# Altium PCB MiniDisplay.PcbDoc
Units mil, origin at the board's own origin, x right, y up, seen from the top; angles counter-clockwise.
Board outline 1889.76 x 1889.76 mil, 2 copper layers (Top Layer, Bottom Layer), stack 12.8 mil thick; 76 components, 91 nets, 408 pads, 90 vias.
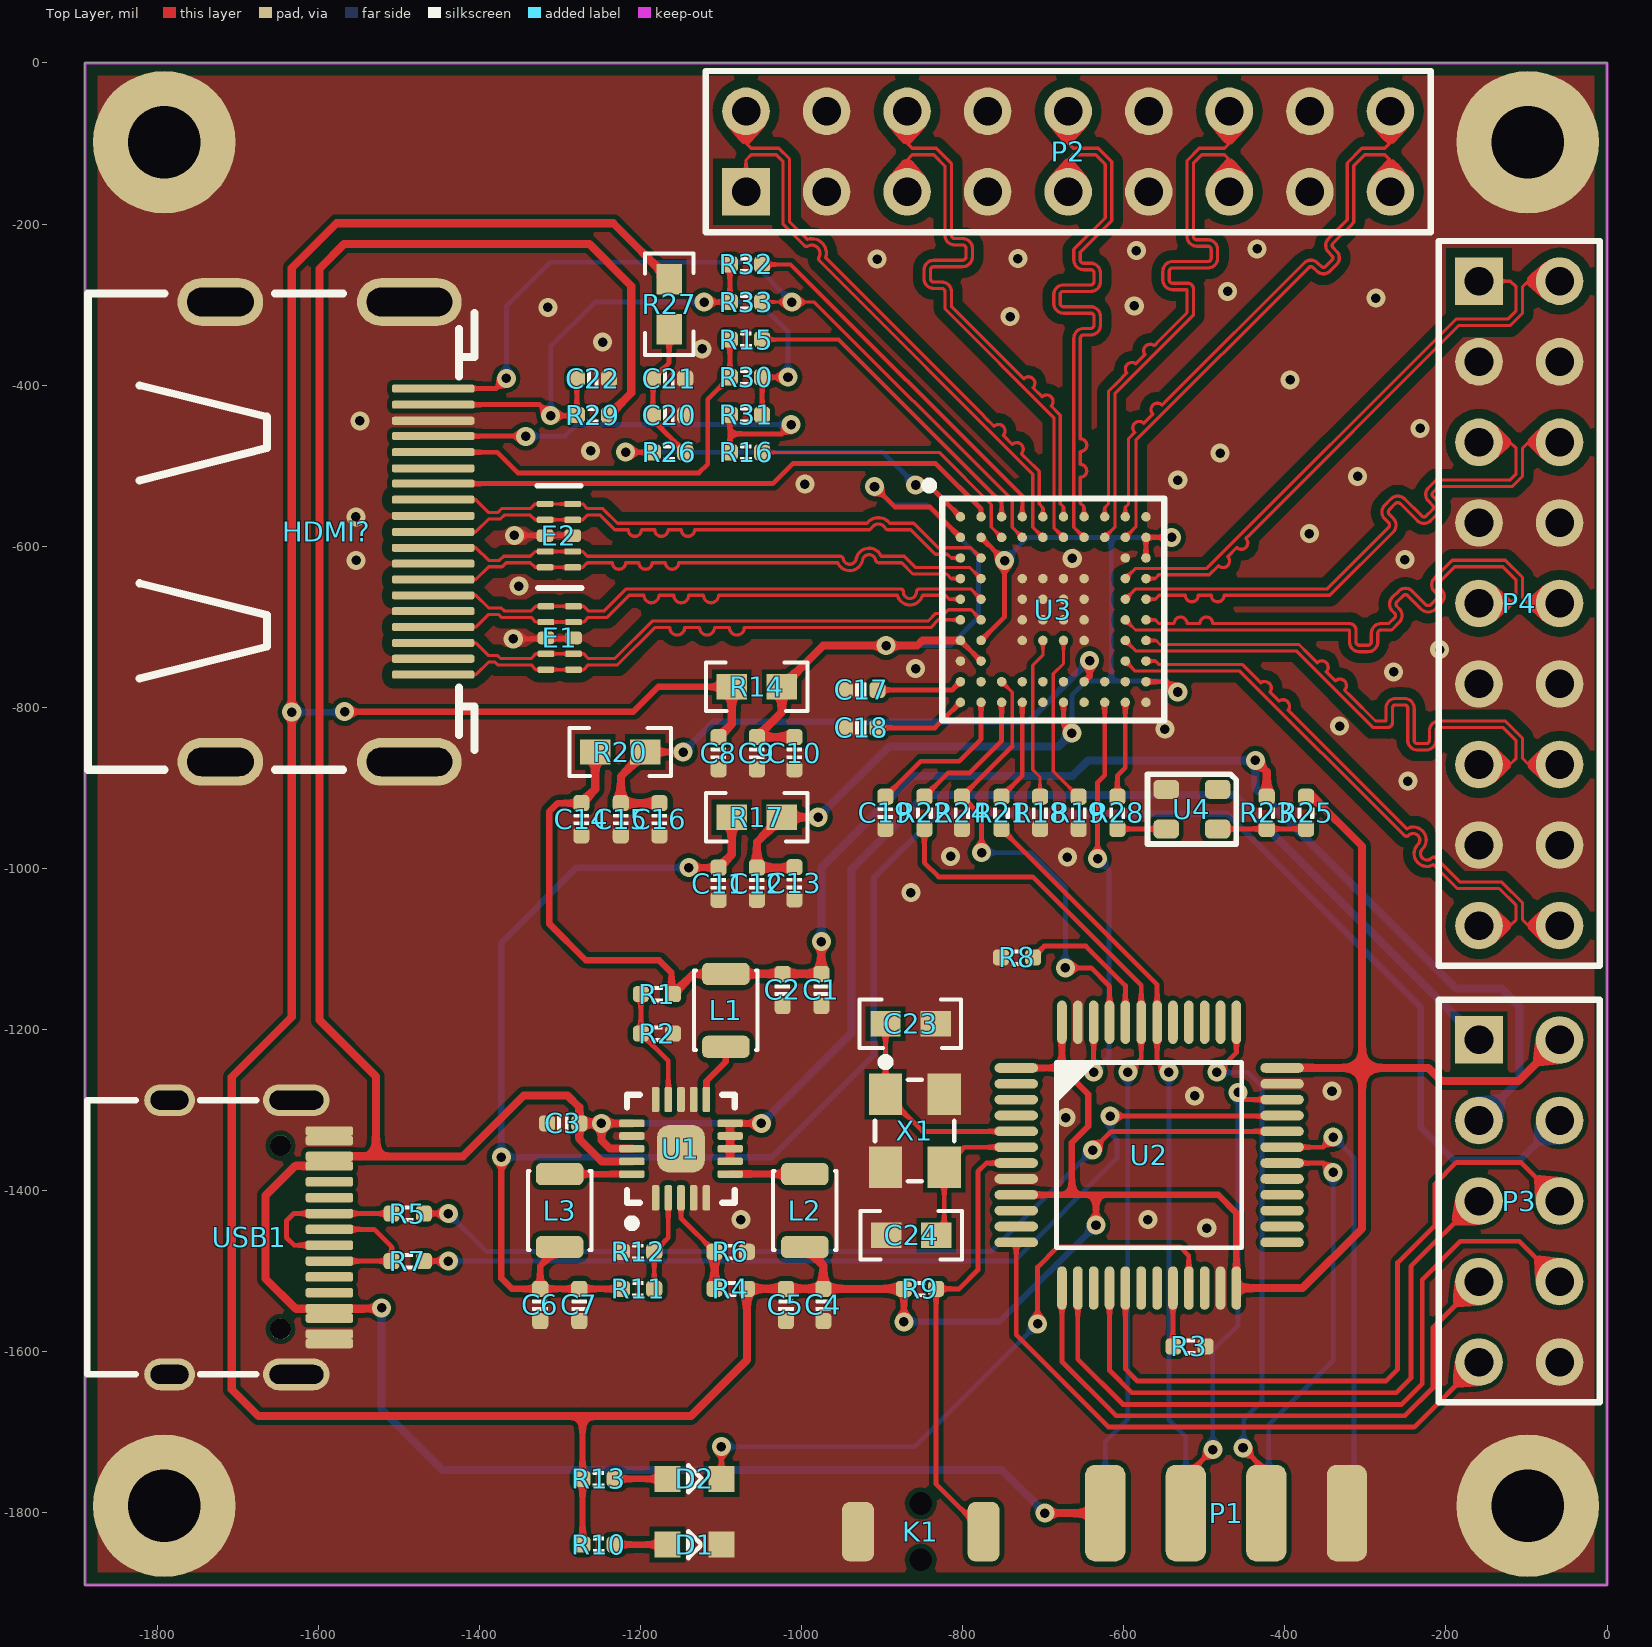
[diagram p0: Top Layer view]
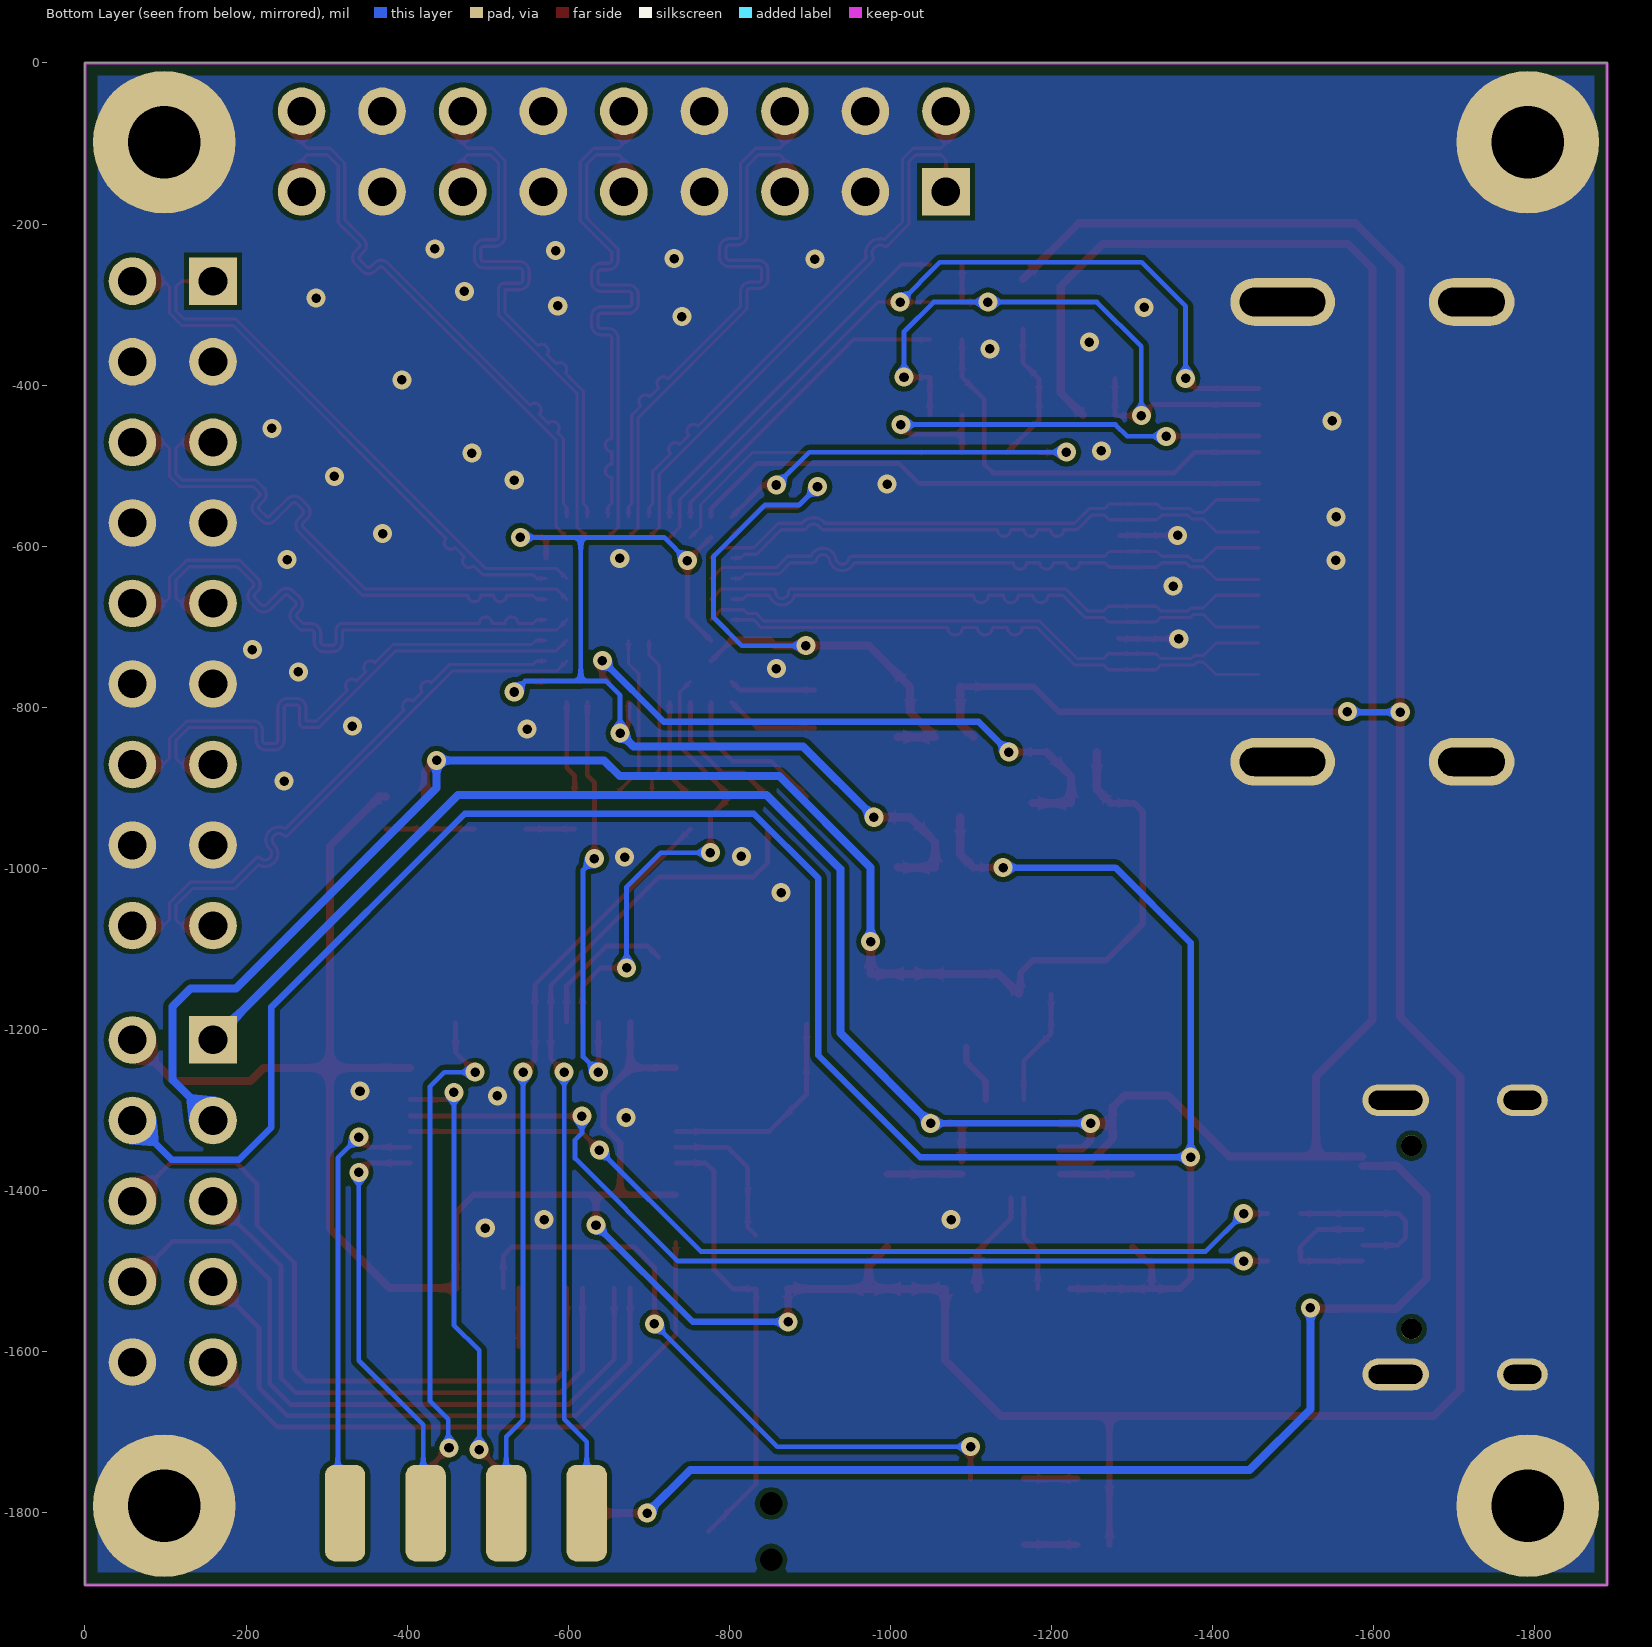
[diagram p1: Bottom Layer view, seen from below]
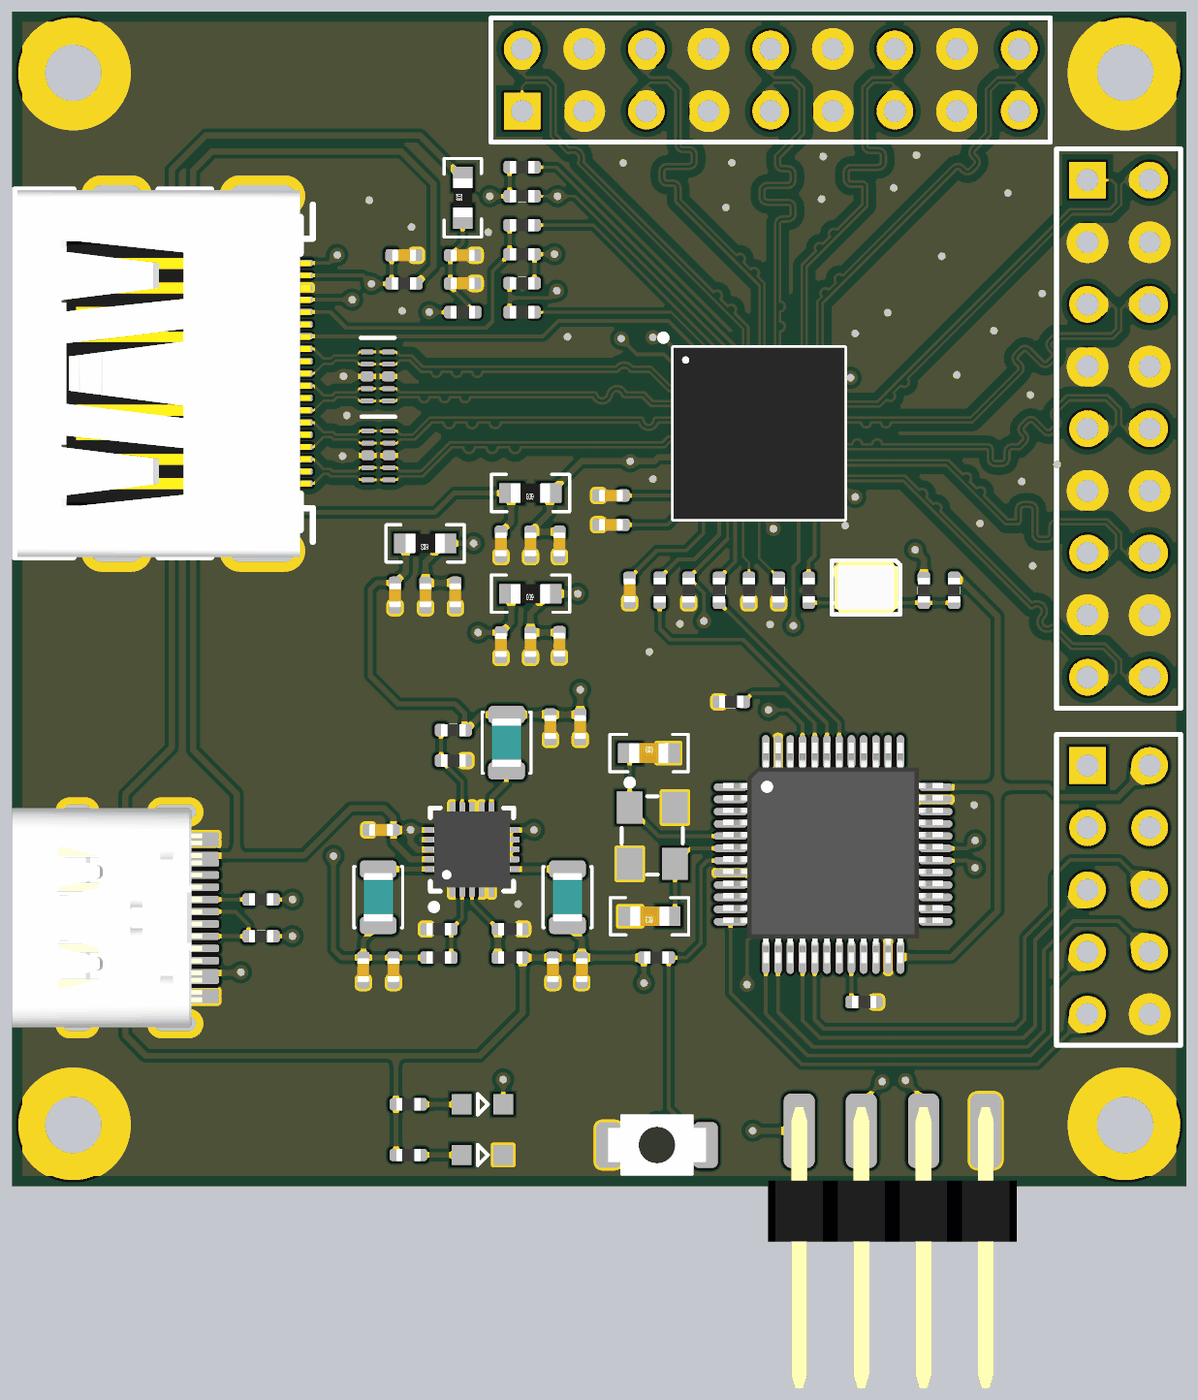
[diagram p2: 3D render of the assembled board from above, using the file's embedded part models]

## Layer stack, top to bottom
Top Solder: solder mask 0.4, Solder Resist, Dk 3.5
Top Layer: signal copper 1.4
Dielectric 1: core 10, FR-4, Dk 4.2
Bottom Layer: signal copper 1.4
Bottom Solder: solder mask 0.4, Solder Resist, Dk 3.5

## Board outline
-1889.76,-1889.76 -1889.76,0 0,0 0,-1889.76

## Design rules (kind name [scope] priority, off if disabled: settings)
BoardOutlineClearance [All] p1: gap=15.75 ignorepadtopadclearanceinfootprint=FALSE
Clearance Clearance_2 [InNamedPolygon('GND_L01_P002') vs (InDifferentialPairClass('All Differential Pairs'))] p1: gap=12 ignorepadtopadclearanceinfootprint=FALSE
Clearance Clearance_1 [InNamedPolygon('GND_L02_P003') Or  InNamedPolygon('GND_L01_P002')] p2: gap=6 ignorepadtopadclearanceinfootprint=FALSE
Clearance [All] p3: gap=4 ignorepadtopadclearanceinfootprint=FALSE
ComponentClearance [All] p1: gap=1 collisioncheckmode=3 verticalgap=1 showdistances=FALSE
DiffPairsRouting HDMI_DiffPairsRouting [InDifferentialPair ('HDMID0') Or InDifferentialPair ('HDMIC') Or InDifferentialPair ('HDMID2') Or InDifferentialPair ('HDMID1')] p1: maxlimit=10 minlimit=4 mostfreqgap=4 toplayer_minwidth=4 toplayer_maxwidth=10 toplayer_prefwidth=4 bottomlayer_minwidth=4 bottomlayer_maxwidth=10 bottomlayer_prefwidth=4 maxuncoupledlength=500
DiffPairsRouting MIPI_DiffPairsRouting [InDifferentialPair ('MIPI1_D2') Or InDifferentialPair ('MIPI1_D0') Or InDifferentialPair ('MIPI0_D3') Or InDifferentialPair ('MIPI0_DC') Or InDifferentialPair ('MIPI0_D2') Or InDifferentialPair ('MIPI1_D1') Or InDifferentialPair ('MIPI1_DC') Or InDifferentialPair ('MIPI0_D1') Or InDifferentialPair ('MIPI1_D3') Or InDifferentialPair ('MIPI0_D0')] p2: maxlimit=10 minlimit=4 mostfreqgap=4 toplayer_minwidth=4 toplayer_maxwidth=10 toplayer_prefwidth=4 bottomlayer_minwidth=4 bottomlayer_maxwidth=10 bottomlayer_prefwidth=4 maxuncoupledlength=500
DiffPairsRouting [All] p3: maxlimit=10 minlimit=10 mostfreqgap=10 toplayer_minwidth=15 toplayer_maxwidth=15 toplayer_prefwidth=15 bottomlayer_minwidth=15 bottomlayer_maxwidth=15 bottomlayer_prefwidth=15 maxuncoupledlength=500
MatchedLengths HDMI_MatchedLengths [InDifferentialPair ('HDMID0') Or InDifferentialPair ('HDMIC') Or InDifferentialPair ('HDMID2') Or InDifferentialPair ('HDMID1')] p1: tolerance=10 checknetsindiffpair=FALSE checkdiffpairvsdiffpair=TRUE checkxsignals=TRUE checkothers=TRUE
MatchedLengths MIPI_MatchedLengths [InDifferentialPair ('MIPI1_D2') Or InDifferentialPair ('MIPI1_D0') Or InDifferentialPair ('MIPI0_D3') Or InDifferentialPair ('MIPI0_DC') Or InDifferentialPair ('MIPI0_D2') Or InDifferentialPair ('MIPI1_D1') Or InDifferentialPair ('MIPI1_DC') Or InDifferentialPair ('MIPI0_D1') Or InDifferentialPair ('MIPI1_D3') Or InDifferentialPair ('MIPI0_D0')] p2: tolerance=10 checknetsindiffpair=FALSE checkdiffpairvsdiffpair=TRUE checkxsignals=TRUE checkothers=TRUE
MinimumSolderMaskSliver [All] p1: minsoldermaskwidth=0
PolygonConnect PolygonConnect_2 [All vs IsNamedPolygon('GND_L02_P003') Or  IsNamedPolygon('GND_L01_P002')] p1: connectstyle=Direct reliefconductorwidth=10 reliefentries=4 polygonreliefangle="90 Angle" airgapwidth=10
PolygonConnect PolygonConnect_1 [All vs IsNamedPolygon('Top Layer-No Net') Or  IsNamedPolygon('Top Layer-No Net1')] p2: connectstyle=Direct reliefconductorwidth=10 reliefentries=4 polygonreliefangle="90 Angle" airgapwidth=10
PolygonConnect [All] p3: connectstyle=Relief reliefconductorwidth=10 reliefentries=4 polygonreliefangle="90 Angle" airgapwidth=10
RoutingVias [All] p1: holewidth=28 width=50 viastyle="Through Hole" minholewidth=28 minwidth=50 maxholewidth=28 maxwidth=50
SilkToSilkClearance [All] p1: silktosilkclearance=0
SilkToSolderMaskClearance [IsPad] p1: minsilkscreentomaskgap=0 clearancetoexposedcopper=TRUE
SolderMaskExpansion [All] p1: expansion=4
Width [All] p1: maxlimit=100 minlimit=4 preferedwidth=6 minimp=50.000000 maximp=50.000000 favimp=50.000000
25 further rules are at their usual default settings.

## Classes and differential pairs
differential pair class HDMI: HDMIC HDMID0 HDMID1 HDMID2
differential pair class MIPI: MIPI0_D0 MIPI0_D1 MIPI0_D2 MIPI0_D3 MIPI0_DC MIPI1_D0 MIPI1_D1 MIPI1_D2 MIPI1_D3 MIPI1_DC
component class U_Connector: C22 E1 E2 HDMI? P2 P3 P4 R29 R30 R31 R32 R33
component class TC358870XBG: C8 C9 C10 C11 C12 C13 C14 C15 C16 C17 C18 C19 C20 C21 R14 R15 R16 R17 R18 R19 R20 R21 R22 R23 R24 R25 R26 R27 R28 U3 U4
component class Main: C1 C2 C3 C4 C5 C6 C7 C23 C24 D1 D2 K1 L1 L2 L3 P1 R1 R2 R3 R4 R5 R6 R7 R8 R9 R10 R11 R12 R13 T1 T2 T3 T4 U1 U2 USB1 X1
differential pair MIPI1_DC: +MIPI1_DC_P -MIPI1_DC_N
differential pair MIPI1_D3: +MIPI1_D3_P -MIPI1_D3_N
differential pair MIPI1_D2: +MIPI1_D2_P -MIPI1_D2_N
differential pair MIPI1_D1: +MIPI1_D1_P -MIPI1_D1_N
differential pair MIPI1_D0: +MIPI1_D0_P -MIPI1_D0_N
differential pair MIPI0_DC: +MIPI0_DC_P -MIPI0_DC_N
differential pair MIPI0_D3: +MIPI0_D3_P -MIPI0_D3_N
differential pair MIPI0_D2: +MIPI0_D2_P -MIPI0_D2_N
differential pair MIPI0_D1: +MIPI0_D1_P -MIPI0_D1_N
differential pair MIPI0_D0: +MIPI0_D0_P -MIPI0_D0_N
differential pair HDMID2: +HDMID2_P -HDMID2_N
differential pair HDMID1: +HDMID1_P -HDMID1_N
differential pair HDMID0: +HDMID0_P -HDMID0_N
differential pair HDMIC: +HDMIC_P -HDMIC_N

## Components (designator, comment, footprint, x,y, rotation, side; value= is the part's Value field where it differs from the comment)
C1 "10uF" CAP_0402 -975.5,-1150.95 r90 top value=0.1u
C2 "0.1uF" CAP_0402 -1023.5,-1150.95 r270 top value=0.1u
C3 "10uF" CAP_0402 -1296,-1316.53 r0 top value=0.1u
C4 "10uF" CAP_0402 -973,-1542 r90 top value=0.1u
C5 "0.1uF" CAP_0402 -1019.5,-1542 r270 top value=0.1u
C6 "10uF" CAP_0402 -1324.5,-1542 r90 top value=0.1u
C7 "0.1uF" CAP_0402 -1276,-1542 r270 top value=0.1u
C8 "10uF" CAP_0402 -1103,-857 r90 top value=0.1u
C9 "10nF" CAP_0402 -1055.5,-857 r90 top value=0.1u
C10 "0.1uF" CAP_0402 -1009,-857 r90 top value=0.1u
C11 "10uF" CAP_0402 -1103,-1019 r90 top value=0.1u
C12 "10nF" CAP_0402 -1055.5,-1019 r90 top value=0.1u
C13 "0.1uF" CAP_0402 -1009,-1018.5 r90 top value=0.1u
C14 "10uF" CAP_0402 -1273.5,-939 r90 top value=0.1u
C15 "10nF" CAP_0402 -1224.5,-939 r90 top value=0.1u
C16 "0.1uF" CAP_0402 -1176.5,-939 r90 top value=0.1u
C17 "0.1uF" CAP_0402 -926,-778.5 r180 top value=0.1u
C18 "0.1uF" CAP_0402 -926,-825.5 r180 top value=0.1u
C19 "0.1uF" CAP_0402 -896,-931 r270 top value=0.1u
C20 "10nF" CAP_0402 -1164.5,-437.23 r180 top value=0.1u
C21 "0.1uF" CAP_0402 -1164.5,-391.98 r180 top value=0.1u
C22 "10uF" CAP_0402 -1259,-391.98 r180 top value=0.1u
C23 "16pf" 0603_CAP -864.73,-1193 r0 top
C24 "16pf" 0603_CAP -863.9,-1455.5 r180 top
D1 "color?" SMDLED-0603 -1166.43,-1839.5 r0 top
D2 "color?" SMDLED-0603 -1166.43,-1758 r0 top
E1 "E?" DFN-2510 -1300.28,-713.87 r270 top
E2 "E?" DFN-2510 -1301.28,-586.87 r270 top
HDMI? "HDMI-SWM-19" HDMI-SWM-19 -1676,-582.26 r90 top
K1 "TACT 2P" ButtonTACT_3x4x2_180H -852,-1823.5 r180 top value=3x4
L1 "2.2uH" 2520-L -1094,-1176.22 r90 top
L2 "2.2uH" 2520-L -996,-1424.8 r270 top
L3 "2.2uH" 2520-L -1300.5,-1424.8 r270 top
P1 "HDR2x4_2.54" HDR2X4_2.54_180H -323,-1800.5 r270 top
P2 "Header 9X2" HDR2X9 -1069,-160 r0 top
P3 "Header 5X2" HDR2X5 -159,-1213 r270 top
P4 "Header 9X2" HDR2X9 -159,-271 r270 top
R1 "200K" RES_0402 -1179.5,-1156 r0 top value=22R
R2 "100K" RES_0402 -1179.5,-1205 r180 top value=22R
R3 "10K" RES_0402 -518.5,-1593.5 r0 top value=22R
R4 "510K" RES_0402 -1088,-1522 r0 top value=22R
R5 "22R" RES_0402 -1489,-1428.47 r0 top
R6 "110K" RES_0402 -1088,-1476 r180 top value=22R
R7 "22R" RES_0402 -1489,-1487.53 r0 top
R8 "10K" RES_0402 -732.5,-1110.5 r180 top value=22R
R9 "10K" RES_0402 -853,-1522 r180 top value=22R
R10 "1K" RES_0402 -1252,-1839.5 r0 top value=22R
R11 "92K" RES_0402 -1203,-1522 r180 top value=22R
R12 "110K" RES_0402 -1203,-1476 r0 top value=22R
R13 "1K" RES_0402 -1252,-1758 r0 top value=22R
R14 "120R磁珠" 0603_RES -1055.6,-774.5 r180 top value=22R
R15 "33R" RES_0402 -1069,-343.54 r0 top value=22R
R16 "33R" RES_0402 -1069,-483.5 r0 top value=22R
R17 "120R磁珠" 0603_RES -1055.6,-936.5 r180 top value=22R
R18 "10K" RES_0402 -704,-931 r90 top value=22R
R19 "10K" RES_0402 -656,-931 r90 top value=22R
R20 "120R磁珠" 0603_RES -1225.1,-855.5 r180 top value=22R
R21 "33R" RES_0402 -752,-931 r90 top value=22R
R22 "33R" RES_0402 -847.5,-931 r90 top value=22R
R23 "0R" RES_0402 -422.5,-931 r90 top value=22R
R24 "47K" RES_0402 -801,-931 r270 top value=22R
R25 "NC" RES_0402 -373.72,-931 r90 top value=22R
R26 "2K 0.1%" RES_0402 -1164.5,-483.5 r0 top value=22R
R27 "120R磁珠" 0603_RES -1164.5,-299.4 r90 top value=22R
R28 "33R" RES_0402 -608,-931 r90 top value=22R
R29 "NC?" RES_0402 -1259,-437.23 r180 top value=22R
R30 "47K" RES_0402 -1069,-390.19 r0 top value=22R
R31 "47K" RES_0402 -1069,-436.85 r0 top value=22R
R32 "1K 1%" RES_0402 -1069,-250.23 r180 top value=22R
R33 "2.2K" RES_0402 -1069,-296.89 r0 top value=22R
U1 "EA3036" QFN-20 -1149.75,-1348.02 r90 top
U2 "STM32F103CBT6" LQFP-48 -568.5,-1356 r0 top
U3 "TC358870XBG" VFBGA-80 -687.66,-678.61 r0 top
U4 "晶振-4Pin" 晶振2520 -515.39,-926.39 r180 top
USB1 "Type-C" Type-C-TOP -1685.5,-1458 r180 top
X1 "12M" XTAL3225 -895.83,-1280.45 r270 top

## Footprints (in the part's own frame and the unit in brackets; to place one, negate y for a bottom-side part, rotate by r counter-clockwise, add the part's x,y. Pads: shape width x height; smd on the part's side, far side on the other; paste and mask are expansions set on the pad)
0603_CAP [mm]
  rect 0.96x0.8 smd: 1(-0.79,0) 2(0.79,0)
  silkscreen extent -1.6,-0.76 1.6,0.76, body extent -0.81,-0.4 0.79,0.4, height 0.3
0603_RES [mm]
  rect 0.96x0.8 smd: 1(-0.79,0) 2(0.79,0)
  silkscreen extent -1.6,-0.76 1.6,0.76, body extent -0.8,-0.4 0.8,0.4, height 0.3
2520-L [mm]
  rrect50% 0.7x1.5 smd: 1(-1.15,0) 2(1.15,0)
  silkscreen extent -1.25,-1 1.25,1, body extent -1,-0.6 1,0.6, height 0.92
ButtonTACT_3x4x2_180H [mil]
  round 0 hole 28: 0(0,35) 0(0,-35)
  rrect50% 40x74 smd: 1(-78,0) 2(78,0)
  body extent -79,-49 79,49, height 63
CAP_0402 [mil]
  rrect50% 20x20 smd: 1(-20,0) 2(20,0)
  silkscreen extent -7,-9 7,9, body extent -20,-10 20,10, height 20
DFN-2510 [mm]
  rrect50% 0.2x0.525 smd: 1(-1,-0.437) 2(-0.5,-0.438) 4(0.5,-0.438) 5(1,-0.437) 6(1,0.437) 7(0.5,0.437) 9(-0.5,0.437) 10(-1,0.437)
  rrect50% 0.4x0.525 smd: 3(0,-0.438) 8(0,0.437)
  silkscreen extent -1.57,-0.69 -1.57,0.69
HDMI-SWM-19 [mm] "HDMI-SWM-19"
  rrect50% 0.254x2.6 smd: 1(-4.5,-5.55) 2(-4,-5.55) 3(-3.5,-5.55) 4(-3,-5.55) 5(-2.5,-5.55) 6(-2,-5.55) 7(-1.5,-5.55) 8(-1,-5.55) 9(-0.5,-5.55) 10(0,-5.55) 11(0.508,-5.55) 12(1.016,-5.55) 13(1.524,-5.55) 14(2.007,-5.55) 15(2.515,-5.55) 16(3.023,-5.55) 17(3.505,-5.55) 18(4.013,-5.55) 19(4.521,-5.55)
  oval 1.5x2.7 hole 2.1 slot 0.9 at 0 deg: SH1(-7.25,1.16) SH2(7.25,1.16)
  oval 1.5x3.3 hole 2.7 slot 0.9 at 0 deg: SH3(-7.25,-4.8) SH4(7.25,-4.8)
  silkscreen extent -7.5,-6.86 7.52,5.33, body extent -7.5,-6.78 7.5,5.22, height 6.14
HDR2X4_2.54_180H [mil]
  rrect50% 120x50 smd: 1(0,0) 3(0,-100) 5(0,-200) 7(0,-300)
  rrect50% 120x50 smd far side: 2(0,0) 4(0,-100) 6(0,-200) 8(0,-300)
  body extent -38,-350 415,50, height 100
HDR2X5 [mm] "Connector; Header; 5x2 Position"
  rect 1.5x1.5 hole 0.9: 1(0,0)
  round 1.5 hole 0.9: 2(0,2.54) 3(2.54,0) 4(2.54,2.54) 5(5.08,0) 6(5.08,2.54) 7(7.62,0) 8(7.62,2.54) 9(10.16,0) 10(10.16,2.54)
  silkscreen extent -1.27,-1.27 11.43,3.81
HDR2X9 [mm] "Connector; Header; 9x2 Position"
  rect 1.5x1.5 hole 0.9: 1(0,0)
  round 1.5 hole 0.9: 2(0,2.54) 3(2.54,0) 4(2.54,2.54) 5(5.08,0) 6(5.08,2.54) 7(7.62,0) 8(7.62,2.54) 9(10.16,0) 10(10.16,2.54) 11(12.7,0) 12(12.7,2.54) 13(15.24,0) 14(15.24,2.54) 15(17.78,0) 16(17.78,2.54) 17(20.32,0) 18(20.32,2.54)
  silkscreen extent -1.27,-1.27 21.59,3.81
LQFP-48 [mil]
  oval 54x12 smd: 1(-165,108.27) 2(-165,88.58) 3(-165,68.9) 4(-165,49.21) 5(-165,29.53) 6(-165,9.84) 7(-165,-9.84) 8(-165,-29.53) 9(-165,-49.21) 10(-165,-68.9) 11(-165,-88.58) 12(-165,-108.27) 25(165,-108.27) 26(165,-88.58) 27(165,-68.9) 28(165,-49.21) 29(165,-29.53) 30(165,-9.84) 31(165,9.84) 32(165,29.53) 33(165,49.21) 34(165,68.9) 35(165,88.58) 36(165,108.27)
  oval 12x54 smd: 13(-108.27,-165) 14(-88.58,-165) 15(-68.9,-165) 16(-49.21,-165) 17(-29.53,-165) 18(-9.84,-165) 19(9.84,-165) 20(29.53,-165) 21(49.21,-165) 22(68.9,-165) 23(88.58,-165) 24(108.27,-165) 37(108.27,165) 38(88.58,165) 39(68.9,165) 40(49.21,165) 41(29.53,165) 42(9.84,165) 43(-9.84,165) 44(-29.53,165) 45(-49.21,165) 46(-68.9,165) 47(-88.58,165) 48(-108.27,165)
  silkscreen extent -115,-115 115,115, body extent -177,-175 177,180, height 61
QFN-20 [mm] "QFN, 20-Leads, Body 3.00x3.00mm, Pitch 0.40mm, Thermal Pad 1.65x1.65mm, IPC Medium Density"
  rrect50% 0.8x0.24 smd: 1(-1.55,0.8) 2(-1.55,0.4) 3(-1.55,0) 4(-1.55,-0.4) 5(-1.55,-0.8) 11(1.55,-0.8) 12(1.55,-0.4) 13(1.55,0) 14(1.55,0.4) 15(1.55,0.8)
  rrect50% 0.24x0.8 smd: 6(-0.8,-1.55) 7(-0.4,-1.55) 8(0,-1.55) 9(0.4,-1.55) 10(0.8,-1.55) 16(0.8,1.55) 17(0.4,1.55) 18(0,1.55) 19(-0.4,1.55) 20(-0.8,1.55)
  rrect50% 1.5x1.5 smd: 21(0,0)
  silkscreen extent -2.47,-1.7 1.7,1.7, body extent -1.56,-1.56 1.56,1.56, height 0.8
RES_0402 [mil]
  rrect50% 20x20 smd: 1(-20,0) 2(20,0)
  silkscreen extent -7,-10 6,10, body extent -20,-10 20,10, height 14
SMDLED-0603 [mil]
  rect 32x32 smd: 1(0,0) 2(66.93,0)
  silkscreen extent 26,-17 42,17
Type-C-TOP [mm]
  round 0.65 hole 0.65: 0(-0.98,2.89) 0(-0.98,-2.89)
  oval 1.6x1 hole 0.6 slot 1.2 at 0 deg: 1(2.52,4.325) 2(2.52,-4.325)
  oval 2.1x1 hole 0.6 slot 1.7 at 0 deg: 3(-1.48,-4.325) 4(-1.48,4.325)
  rrect50% 1.5x0.3 smd: A1(-2.52,-3.35) A4(-2.52,-2.55) A5(-2.52,-1.25) A6(-2.52,-0.25) A7(-2.52,0.25) A8(-2.52,1.25) A9(-2.52,2.55) A12(-2.52,3.35) B1(-2.52,3.05) B4(-2.52,2.25) B5(-2.52,1.75) B6(-2.52,0.75) B7(-2.52,-0.75) B8(-2.52,-1.75) B9(-2.52,-2.25) B12(-2.52,-3.05)
  silkscreen extent -0.22,-4.33 5.12,4.33, body extent -2.57,-4.48 5.18,4.48, height 3.26
VFBGA-80 [mm]
  round 0.3 smd paste+0 mask+0: A1(-2.925,2.925) A2(-2.275,2.925) A3(-1.625,2.925) A4(-0.975,2.925) A5(-0.325,2.925) A6(0.325,2.925) A7(0.975,2.925) A8(1.625,2.925) A9(2.275,2.925) A10(2.925,2.925) B1(-2.925,2.275) B2(-2.275,2.275) B3(-1.625,2.275) B4(-0.975,2.275) B5(-0.325,2.275) B6(0.325,2.275) B7(0.975,2.275) B8(1.625,2.275) B9(2.275,2.275) B10(2.925,2.275) C1(-2.925,1.625) C2(-2.275,1.625) C9(2.275,1.625) C10(2.925,1.625) D1(-2.925,0.975) D2(-2.275,0.975) D4(-0.975,0.975) D5(-0.325,0.975) D6(0.325,0.975) D7(0.975,0.975) D9(2.275,0.975) D10(2.925,0.975) E1(-2.925,0.325) E2(-2.275,0.325) E4(-0.975,0.325) E5(-0.325,0.325) E6(0.325,0.325) E7(0.975,0.325) E9(2.275,0.325) E10(2.925,0.325) F1(-2.925,-0.325) F2(-2.275,-0.325) F4(-0.975,-0.325) F5(-0.325,-0.325) F6(0.325,-0.325) F7(0.975,-0.325) F9(2.275,-0.325) F10(2.925,-0.325) G1(-2.925,-0.975) G2(-2.275,-0.975) G4(-0.975,-0.975) G5(-0.325,-0.975) G6(0.325,-0.975) G7(0.975,-0.975) G9(2.275,-0.975) G10(2.925,-0.975) H1(-2.925,-1.625) H2(-2.275,-1.625) H9(2.275,-1.625) H10(2.925,-1.625) J1(-2.925,-2.275) J2(-2.275,-2.275) J3(-1.625,-2.275) J4(-0.975,-2.275) J5(-0.325,-2.275) J6(0.325,-2.275) J7(0.975,-2.275) J8(1.625,-2.275) J9(2.275,-2.275) J10(2.925,-2.275) K1(-2.925,-2.925) K2(-2.275,-2.925) K3(-1.625,-2.925) K4(-0.975,-2.925) K5(-0.325,-2.925) K6(0.325,-2.925) K7(0.975,-2.925) K8(1.625,-2.925) K9(2.275,-2.925) K10(2.925,-2.925)
  silkscreen extent -4.04,-3.5 3.5,4.04, body extent -3.5,-3.5 3.5,3.5, height 1
XTAL3225 [mm]
  rect 1.3x1.05 smd: 1(0,0) 2(2.3,0) 3(2.3,1.85) 4(0,1.85)
  silkscreen extent -1.14,-0.33 2.74,2.17
晶振2520 [mm]
  rrect50% 0.8x0.6 smd: 1(-0.81,-0.625) 2(0.81,-0.625) 3(0.81,0.625) 4(-0.81,0.625)
  silkscreen extent -1.4,-1.1 1.4,1.1, body extent -1.3,-1.05 1.3,1.05, height 0.55

## Part data
C1 C2 C3 C4 C5 C6 C7 C8 C9 C10 C11 C12 C13 C14 C15 C16 C17 C18 C19 C20 C21 C22: library part 电容-0402, "Capacitor"
C23 C24: library part C
D1 D2: library part LED_0402, "LED", Type=0402
E1 E2: library part AZ1045-04F
HDMI?: library part HDMI-MC34931HDMI-SWM-19
K1: library part ButtonTACT_3x4x2_180, "Button", Type="TACT 2P"
L1 L2 L3: library part 电感-2520, "磁珠"
P1: "Header"
P2 P4: "Header, 9-Pin, Dual row", LatestRevisionDate=17-Jul-2002, LatestRevisionNote="Re-released for DXP Platform.", Publisher="Altium Limited"
P3: "Header, 5-Pin, Dual row", LatestRevisionDate=17-Jul-2002, LatestRevisionNote="Re-released for DXP Platform.", Publisher="Altium Limited"
R1 R2 R3 R4 R5 R6 R7 R8 R9 R10 R11 R12 R13 R15 R16 R18 R19 R21 R22 R23 R24 R25 R26 R28 R29 R30 R31 R32 R33: library part 电阻-0402, "Resistor"
R14 R17 R20 R27: library part 电阻-0805, "Resistor"
U1: "EA3036 is a 3CH power management IC for applications powered by one Li-Ion battery or a DC 5V adapter."
U2: "ARM Cortex-M3 32-bit MCU, 128 KB Flash, 20 KB Internal RAM, 37 I/Os, 48-pin LQFP, -40 to 85 degC, Tray", I/Os (High Current)=37, Operating Frequency(F) (Processor speed) (MHz)=72, Supplier Part Number 1=497-6288-ND, Supply Voltage(Vcc) min (V)=2, A/D Converter="2x12-bit (10 Channel)", ComponentLink1Description="Manufacturer URL", ComponentLink1URL=http://www.st.com/web/en/home.html, ComponentLink2Description=Datasheet, ComponentLink2URL=http://www.st.com/st-web-ui/static/active/en/resource/technical/document/datasheet/CD00161566.pdf, ComponentLink3Description="Package Specification", ComponentLink3URL=http://www.st.com/st-web-ui/static/active/en/resource/technical/document/datasheet/DM00058181.pdf, Core="ARM Cortex-M3", DatasheetVersion="Rev. 16", FLASH Size (Prog) (kB)=128, Internal RAM Size (kB)=20, Mounting Technology="Surface Mount", PackageDescription="48-Pin Low Profile Quad Flat Package, 7 x 7 mm Body, 0.5 mm Pitch", PackageReference=LQFP48, PackageVersion="Rev. 6, 06/2013", Packing=Tray, PartNumber=STM32F103CBT6, Supplier 1=Digi-Key, Supplier 2=Farnell, Supplier 3=Newark, Supplier 4=Newark, Supplier 5=Mouser, Supplier Part Number 2=1606327, Supplier Part Number 3=11N8296, Supplier Part Number 4=57P1214, Supplier Part Number 5=511-STM32F103CBT6
U4: "5032 有源"
USB1: library part USB-Type-C-TOP
X1: library part XTAL-4P, "4脚无源晶振", BOM名称=4脚无源晶振, 学习资源=www.ooocke.com, 版权归属=源创客

## Free pads (board coordinates)
  round 177.17 hole 90.55: 30(-1791.34,-1791.34) 30(-1791.34,-98.43) 30(-98.43,-1791.34) 30(-98.43,-98.43)

## Via types
v1: diameter 23.62, hole 11.81, Top Layer to Bottom Layer, tented both sides, 90 vias

## Nets (pads, with @x,y where several pads share a name; then routed paths per layer and width w, separated by ;. In a path a pad name is that pad's centre, name@x,y a point inside that pad or via, vN(x,y) a via of type N, cw(c..) or ccw(c..) an arc to the next point about the centre after c; other vN are vias at no path point)
B_REFCLK: R28.2 U3.K9 | length 121.3
  Top Layer w6: R28.2 -608,-885 -598.09,-875.09 U3.K9
B_RESX: U2.46 U3.K8 | length 544.2
  Top Layer w6: v1(-637.4,-1253) U2.46 ; v1@-628.5,-992 v1(-632.5,-988) -632.5,-893 -623.68,-884.18 U3.K8
  Bottom Layer w6: v1(-637.4,-1253) -618.5,-1234.1 -618.5,-1002 v1(-632.5,-988)
BOOT0: R8.1 U2.44 | length 186.1
  Top Layer w6: R8.1 -698.5,-1096.5 -647,-1096.5 -598.03,-1145.47 U2.44
BOOT1: R3.1 U2.20 | length 72.7
  Top Layer w6: U2.20 -538.97,-1593.03 R3.1
CEC: HDMI?.13 U3.A2 | length 723.5
  Top Layer w6: HDMI?.13 -1035.76,-522.26 -1011,-497.5 -833.5,-497.5 -777.22,-553.78 U3.A2
D_SWCLK: P1.3 U2.37 | length 687
  Top Layer w6: v1(-484.5,-1253) -460.23,-1228.73 U2.37 ; v1(-452,-1719.5) -423,-1748.5 P1.3
  Bottom Layer w6: v1(-484.5,-1253) -446,-1253 -428.5,-1270.5 -428.5,-1661.5 -451,-1684 -451,-1718.5 v1(-452,-1719.5)
D_SWDIO: P1.5 U2.34 | length 607.7
  Top Layer w6: P1.5 -523,-1755 v1(-489.5,-1721.5) ; v1(-458,-1278) -448.9,-1287.1 U2.34
  Bottom Layer w6: v1(-489.5,-1721.5) -489.5,-1598.5 -458,-1567 v1(-458,-1278)
GND: C1.1 C2.2 C3.1 C4.1 C5.2 C6.1 C7.2 C8.1 C9.1 C10.1 C11.1 C12.1 C13.1 C14.1 C15.1 C16.1 C17.2 C18.2 C19.2 C20.1 C21.1 C22.1 C23.2 C24.2 D1.2 E1.3 E1.8 E2.3 E2.8 HDMI?.2 HDMI?.5 HDMI?.8 HDMI?.11 HDMI?.17 HDMI?.SH1 HDMI?.SH2 HDMI?.SH3 HDMI?.SH4 K1.2 P1.1 P2.3 P2.4 P2.7 P2.8 P2.11 P2.12 P2.15 P2.16 P3.10 P4.3 P4.4 P4.7 P4.8 P4.11 P4.12 P4.15 P4.16 pad.30 R2.1 R3.2 R6.1 R8.2 R12.1 R18.1 R19.1 R24.2 U1.1 U1.4 U1.5 U1.12 U1.13 U1.15 U1.17 U1.21 U2.8 U2.23 U2.35 U2.47 U3.A10 U3.C9 U3.D4 U3.D5 U3.D6 U3.D7 U3.E4 U3.E5 U3.E6 U3.E7 U3.F4 U3.F5 U3.F6 U3.F7 U3.G4 U3.G7 U3.H1 U3.K10 U4.2 USB1.1 USB1.2 USB1.3 USB1.4 USB1.A1 USB1.A12 USB1.B1 USB1.B12 X1.2 X1.4 | length 148
  Top Layer w6: v1(-1358,-715) -1284.18,-715 E1.8 ; v1(-1356.5,-586.5) -1284.42,-586.5 E2.8
  other v1: -497,-1446.5 -1075.5,-1436 -570,-1436 -672,-1309.5 -512,-1282.5 -341.5,-1276.5 -864.31,-1030 -670,-986 -815,-985 -247.37,-891.74 -549,-827 -332,-823.5 -265,-755.94 -858.5,-752 -208,-728.5 -1351,-649.5 -1553,-617.5 -251,-616.63 -664,-615 -369.5,-584.5 -1553.5,-563.46 -996.07,-523 -533,-517.84 -309.78,-513.31 -480.5,-484.42 -1262,-481.5 -232,-453.63 -1548.5,-444.26 -393.5,-393.5 -1123.5,-355 -1247,-346.5 -741,-315 -1315,-303.5 -587,-301.5 -287,-291.89 -471,-283.5 -906.26,-243.5 -731.5,-243.02 -584.5,-233 -434.5,-230.87
HDMIC_N: E2.1 E2.10 HDMI?.12 U3.C2 | length 723.6
  Top Layer w4: HDMI?.12 -1404.32,-542.26 -1388.32,-558.26 -1377.5,-558.26 -1372.58,-553.34 -1336.68,-553.34 -1330.83,-547.5 E2.1 -1306.17,-547.5 E2.10 -1271.72,-547.5 -1265.87,-553.34 -1246.69,-553.34 -1228.53,-571.5 -918.8,-571.5 cw(c-904.66,-582.29) -890.51,-571.5 -861,-571.5 -830.5,-602 -819,-602 -814.36,-602 -802.82,-602 -789.86,-602 U3.C2
HDMIC_P: E2.2 E2.9 HDMI?.10 U3.C1 | length 723.7
  Top Layer w4: HDMI?.10 -1404.32,-582.26 -1388.32,-566.26 -1374.19,-566.26 -1369.27,-561.34 -1336.68,-561.34 -1330.83,-567.19 E2.2 E2.9 -1271.72,-567.19 -1265.87,-561.34 -1250,-561.34 -1231.84,-579.5 -1215.34,-579.5 ccw(c-1207.09,-579.5) -1198.84,-579.5 -1182.34,-579.5 ccw(c-1174.09,-579.5) -1165.84,-579.5 -1149.34,-579.5 ccw(c-1141.09,-579.5) -1132.84,-579.5 -1116.34,-579.5 -1111.5,-579.5 -916.66,-579.5 ccw(c-916.66,-575.5) -913.16,-577.45 ; -913.18,-577.47 cw(c-904.66,-582.29) -896.14,-577.47 ; -896.15,-577.45 ccw(c-892.66,-575.5) -892.66,-579.5 -864.31,-579.5 -833.81,-610 -819,-610 -814.36,-614.64 U3.C1
HDMID0_N: E2.4 E2.7 HDMI?.9 U3.D2 | length 724.3
  Top Layer w4: HDMI?.9 -1404.32,-601.94 -1388.63,-617.63 -1375.13,-617.63 -1369.9,-612.4 -1336.68,-612.4 -1330.83,-606.56 E2.4 E2.7 -1271.72,-606.56 -1265.87,-612.4 -952.26,-612.4 cw(c-952.26,-616.4) -948.32,-615.68 ccw(c-940.26,-614.2) -932.19,-615.68 cw(c-916.26,-618.6) -901.29,-612.4 -872.6,-612.4 -858.46,-626.54 -819.96,-626.54 -814.27,-626.54 -802.82,-626.54 -790.91,-626.54 U3.D2
HDMID0_P: E2.5 E2.6 HDMI?.7 U3.D1 | length 723.6
  Top Layer w4: HDMI?.7 -1404.32,-641.32 -1388.63,-625.63 -1371.82,-625.63 -1366.58,-620.4 -1336.68,-620.4 -1330.83,-626.24 E2.5 E2.6 -1271.72,-626.24 -1265.87,-620.4 -1251.5,-620.4 -1235,-620.4 ccw(c-1226.75,-620.4) -1218.5,-620.4 -1202,-620.4 ccw(c-1193.75,-620.4) -1185.5,-620.4 -1169,-620.4 ccw(c-1160.75,-620.4) -1152.5,-620.4 -1150.5,-620.4 -955.23,-620.4 ccw(c-940.26,-614.2) -924.32,-617.12 cw(c-916.26,-618.6) -908.19,-617.12 ccw(c-904.26,-616.4) -904.26,-620.4 -875.92,-620.4 -861.77,-634.54 -819.96,-634.54 -814.27,-640.23 U3.D1
HDMID1_N: E1.1 E1.10 HDMI?.6 U3.E2 | length 723.5
  Top Layer w4: HDMI?.6 -1404.32,-661 -1388.63,-676.68 -1373,-676.68 -1369.34,-680.34 -1335.68,-680.34 -1329.83,-674.5 E1.1 -1305.17,-674.5 E1.10 -1270.72,-674.5 -1264.87,-680.34 -1244.84,-680.34 -1217.5,-653 -877.5,-653 cw(c-877.5,-657) -873.5,-657 ccw(c-865.5,-657) -857.5,-657 cw(c-853.5,-657) -853.5,-653 -816.68,-653 -790.04,-653 U3.E2
HDMID1_P: E1.2 E1.9 HDMI?.4 U3.E1 | length 723.7
  Top Layer w4: HDMI?.4 -1404.32,-700.37 -1388.63,-684.68 -1376.32,-684.68 -1372.66,-688.34 -1335.68,-688.34 -1329.83,-694.19 E1.2 E1.9 -1270.72,-694.19 -1264.87,-688.34 -1241.53,-688.34 -1214.19,-661 -1195.69,-661 ccw(c-1186.44,-661) -1177.19,-661 -1158.69,-661 ccw(c-1149.44,-661) -1140.19,-661 -1121.69,-661 ccw(c-1112.44,-661) -1103.19,-661 -1100,-661 -880.99,-661 ccw(c-865.5,-657) -850.01,-661 -821.5,-661 -816.68,-665.82 U3.E1
HDMID2_N: E1.4 E1.7 HDMI?.3 U3.F2 | length 723.3
  Top Layer w4: HDMI?.3 -1404.32,-720.06 -1388.63,-735.74 -1377.47,-735.74 -1373.81,-739.4 -1335.68,-739.4 -1329.83,-733.56 E1.4 E1.7 -1270.72,-733.56 -1264.87,-739.4 -1231.9,-739.4 -1185.5,-693 -843.1,-693 -833.51,-683.41 -822.19,-683.41 -817.78,-679 -789.63,-679 U3.F2
HDMID2_P: E1.5 E1.6 HDMI?.1 U3.F1 | length 722.4
  Top Layer w4: HDMI?.1 -1404.32,-759.43 -1388.63,-743.74 -1380.78,-743.74 -1377.13,-747.4 -1335.68,-747.4 -1329.83,-753.24 E1.5 E1.6 -1270.72,-753.24 -1264.87,-747.4 -1228.58,-747.4 -1182.19,-701 -1163.69,-701 ccw(c-1154.44,-701) -1145.19,-701 -1126.69,-701 ccw(c-1117.44,-701) -1108.19,-701 -1089.69,-701 ccw(c-1080.44,-701) -1071.19,-701 -1052.69,-701 -1037.5,-701 -839.78,-701 -830.19,-691.41 U3.F1
HPDI: R32.1 U3.A4 | length 467.6
  Top Layer w5: R32.1 -1013.77,-250.23 -726.04,-537.96 U3.A4
HPDO: HDMI?.19 R33.2 U3.B4 | length 1047.2
  Top Layer w4: R33.2 v1(-1012,-296.89) -984.11,-296.89 -738.5,-542.5 -738.5,-576.59 U3.B4
  Top Layer w6: HDMI?.19 -1379.34,-404.26 v1(-1366.58,-391.5)
  Bottom Layer w6: v1(-1366.58,-391.5) -1366.58,-302.08 -1312,-247.5 -1061.39,-247.5 v1(-1012,-296.89)
INT: R24.1 U2.45 U3.J3 | length 585.3
  Top Layer w4: -776.5,-936.5 -776,-936 ; U3.J3 -738.5,-781.32 -738.5,-848.5
  Top Layer w6: v1(-776.5,-980.5) -776.5,-936.5 ; -776,-936 R24.1 -738.5,-848.5 ; v1(-672.5,-1123.5) -640.5,-1123.5 -617.71,-1146.29 U2.45
  Bottom Layer w6: v1(-776.5,-980.5) -715,-980.5 -672.5,-1023 v1(-672.5,-1123.5)
MIPI0_D0_N: P4.17 U3.H9 | length 703.5
  Top Layer w4: U3.H9 -585.68,-755 -572.5,-755 -560.41,-755 -556,-755 -455.81,-755 -251.85,-958.97 ccw(c-249.02,-956.14) -246.19,-958.97 cw(c-240.53,-964.62) -232.53,-964.62 cw(c-240.53,-964.62) -234.88,-970.28 ccw(c-223.56,-981.59) -215.44,-995.38 -185.81,-1025 -134,-1025 -113,-1046 -113,-1063.5 -120.5,-1071 P4.17
MIPI0_D0_P: P4.18 U3.H10 | length 702.3
  Top Layer w4: U3.H10 -560.41,-742.59 -556,-747 -452.5,-747 -441.19,-758.31 -429.87,-769.63 cw(c-424.97,-776.04) -418.56,-780.94 -407.25,-792.25 cw(c-402.35,-798.67) -395.93,-803.57 -392.75,-806.75 -248.66,-950.84 cw(c-240.53,-964.62) -224.53,-964.62 cw(c-240.53,-964.62) -229.22,-975.94 ccw(c-223.56,-981.59) -217.91,-987.25 cw(c-215.08,-990.08) -212.24,-987.26 ; -212.25,-987.25 -182.5,-1017 -130.69,-1017 -105,-1042.69 -105,-1063.5 -97.5,-1071 P4.18
MIPI0_D1_N: P4.13 U3.G9 | length 701.7
  Top Layer w4: U3.G9 -585.09,-730 -572.5,-730 -560,-730 -555,-730 -385.81,-730 -290.81,-825 -272,-825 ccw(c-272,-819.5) -266.5,-819.5 -266.5,-801.1 cw(c-262.4,-801.1) -262.4,-797 -251.6,-797 cw(c-251.6,-801.1) -247.5,-801.1 -247.5,-840.9 ccw(c-235.4,-840.9) -235.4,-853 -224.6,-853 ccw(c-224.6,-840.9) -212.5,-840.9 -212.5,-829.1 cw(c-208.4,-829.1) -208.4,-825 -129.5,-825 -113,-841.5 -113,-863.5 -120.5,-871 P4.13
MIPI0_D1_P: P4.14 U3.G10 | length 703.3
  Top Layer w4: U3.G10 -560,-717 -555,-722 -382.5,-722 -371.19,-733.31 -359.87,-744.63 cw(c-354.22,-750.28) -348.56,-755.94 -337.25,-767.25 cw(c-331.59,-772.91) -325.93,-778.57 -317.75,-786.75 -287.5,-817 -274.5,-817 -274.5,-801.1 cw(c-262.4,-801.1) -262.4,-789 -251.6,-789 cw(c-251.6,-801.1) -239.5,-801.1 -239.5,-840.9 ccw(c-235.4,-840.9) -235.4,-845 -224.6,-845 ccw(c-224.6,-840.9) -220.5,-840.9 -220.5,-829.1 cw(c-208.4,-829.1) -208.4,-817 -126.19,-817 -105,-838.19 -105,-863.5 -97.5,-871 P4.14
MIPI0_D2_N: P4.5 U3.E9 | length 701.4
  Top Layer w4: U3.E9 -585.27,-653 -572.5,-653 -560.82,-653 -556,-653 -347.5,-653 -271.21,-576.71 ccw(c-274.11,-573.82) -270.01,-573.82 ccw(c-274.11,-573.82) -271.21,-570.92 -276.02,-566.11 cw(c-267.47,-557.55) -276.02,-549 -268.39,-541.36 cw(c-259.83,-549.92) -251.27,-541.36 -230.2,-562.43 ccw(c-227.3,-559.53) -224.4,-562.43 -216.77,-554.79 ccw(c-219.67,-551.89) -215.57,-551.89 ccw(c-219.67,-551.89) -216.77,-549 -221.58,-544.19 cw(c-213.02,-535.63) -221.58,-527.08 -212.34,-517.84 -120.84,-517.84 -113,-510 -113,-478.5 -120.5,-471 P4.5
MIPI0_D2_P: P4.6 U3.E10 | length 704
  Top Layer w4: U3.E10 -560.82,-665.82 -556,-661 -539.5,-661 -523.5,-661 ccw(c-515.5,-661) -507.5,-661 -491.5,-661 ccw(c-483.5,-661) -475.5,-661 -460.5,-661 -344.19,-661 -265.56,-582.37 ccw(c-274.11,-573.82) -262.01,-573.82 ccw(c-274.11,-573.82) -265.56,-565.26 -270.37,-560.45 cw(c-267.47,-557.55) -270.37,-554.65 -262.73,-547.02 cw(c-259.83,-549.92) -256.93,-547.02 -235.86,-568.09 ccw(c-227.3,-559.53) -218.75,-568.09 -211.11,-560.45 ccw(c-219.67,-551.89) -207.57,-551.89 ccw(c-219.67,-551.89) -211.11,-543.34 -215.92,-538.53 cw(c-213.02,-535.63) -215.92,-532.73 -209.03,-525.84 -117.53,-525.84 -105,-513.31 -105,-478.5 -97.5,-471 P4.6
MIPI0_D3_N: P4.1 U3.D9 | length 701.3
  Top Layer w4: U3.D9 -585.36,-627.5 -497,-627.5 -187.5,-318 -123.5,-318 -113,-307.5 -113,-278 -120,-271 P4.1
MIPI0_D3_P: P4.2 U3.D10 | length 703.9
  Top Layer w4: U3.D10 -561.23,-640.23 -556.5,-635.5 -493.69,-635.5 -482.37,-624.19 ccw(c-476.72,-618.53) -471.06,-612.87 -459.75,-601.56 ccw(c-454.09,-595.9) -448.43,-590.25 -445.09,-586.91 -184.19,-326 -120.19,-326 -105,-310.81 -105,-278 -98,-271 P4.2
MIPI0_DC_N: P4.9 U3.F9 | length 700.9
  Top Layer w4: U3.F9 -585.5,-704 -572.5,-704 -561.09,-704 -556.5,-704 -320,-704 ; -319.66,-704.34 -319.66,-718.9 ccw(c-307.56,-718.9) -307.56,-731 -296.76,-731 ccw(c-296.76,-718.9) -284.66,-718.9 -284.66,-708.1 cw(c-280.56,-708.1) -280.56,-704 -267.5,-704 -258.11,-694.61 ccw(c-266.67,-686.06) -254.57,-686.06 ccw(c-266.67,-686.06) -258.11,-677.5 -260.8,-674.82 cw(c-257.9,-671.92) -260.8,-669.02 -253.16,-661.38 cw(c-250.27,-664.28) -247.37,-661.38 -230.54,-678.21 ccw(c-221.98,-669.65) -213.43,-678.21 -205.79,-670.57 ccw(c-214.34,-662.02) -202.24,-662.02 ccw(c-214.34,-662.02) -205.79,-653.46 -208.48,-650.77 cw(c-205.58,-647.87) -208.48,-644.98 -189,-625.5 -129.5,-625.5 -113,-642 -113,-664 -120,-671 P4.9
MIPI0_DC_P: P4.10 U3.F10 | length 704
  Top Layer w4: U3.F10 -561.09,-691.41 -556.5,-696 -537.5,-696 cw(c-529.5,-696) -521.5,-696 -505.5,-696 cw(c-497.5,-696) -489.5,-696 -482.5,-696 -320,-696 cw(c-320,-704.34) -311.66,-704.34 -311.66,-718.9 ccw(c-307.56,-718.9) -307.56,-723 -296.76,-723 ccw(c-296.76,-718.9) -292.66,-718.9 -292.66,-708.1 cw(c-280.56,-708.1) -280.56,-696 -270.81,-696 -263.77,-688.96 ccw(c-266.67,-686.06) -262.57,-686.06 ccw(c-266.67,-686.06) -263.77,-683.16 -266.46,-680.47 cw(c-257.9,-671.92) -266.46,-663.36 -258.82,-655.72 cw(c-250.27,-664.28) -241.71,-655.72 -224.88,-672.55 ccw(c-221.98,-669.65) -219.08,-672.55 -211.45,-664.92 ccw(c-214.34,-662.02) -210.24,-662.02 ccw(c-214.34,-662.02) -211.45,-659.12 -214.13,-656.43 cw(c-205.58,-647.87) -214.13,-639.32 -192.31,-617.5 -126.19,-617.5 -105,-638.69 -105,-664 -98,-671 P4.10
MIPI1_D0_N: P2.17 U3.B9 | length 702.1
  Top Layer w4: U3.B9 -585,-575.96 -585,-468.5 -370.62,-254.12 cw(c-367.72,-257.01) -364.82,-254.12 -360.72,-258.22 ccw(c-352.16,-249.66) -343.6,-258.22 -335.97,-250.58 ccw(c-344.52,-242.02) -332.42,-242.02 ccw(c-344.52,-242.02) -335.97,-233.47 -340.07,-229.37 cw(c-337.17,-226.47) -340.07,-223.57 -319,-202.5 -314.5,-198 -314.5,-127.5 -301,-114 -276,-114 -269,-121 P2.17
MIPI1_D0_P: P2.18 U3.A9 | length 704.7
  Top Layer w4: U3.A9 -598.09,-551.59 -594.19,-547.69 -594.19,-466.37 -586.5,-458.69 cw(c-580.84,-453.03) -575.19,-447.37 -563.87,-436.06 cw(c-558.22,-430.4) -552.56,-424.75 -547.41,-419.59 -376.27,-248.46 cw(c-367.72,-257.01) -359.16,-248.46 -355.06,-252.56 ccw(c-352.16,-249.66) -349.26,-252.56 -341.62,-244.92 ccw(c-344.52,-242.02) -340.42,-242.02 ccw(c-344.52,-242.02) -341.62,-239.12 -345.73,-235.02 cw(c-337.17,-226.47) -345.73,-217.91 -322.5,-194.69 -322.5,-124.19 -304.31,-106 -276,-106 -269,-99 P2.18
MIPI1_D1_N: P2.13 U3.B8 | length 702.9
  Top Layer w4: U3.B8 -611,-576.37 -611,-563.46 -611,-552.18 -611,-547.5 -611,-410.81 -513.5,-313.31 -513.5,-280.5 ccw(c-520.5,-280.5) -520.5,-273.5 -539.4,-273.5 cw(c-539.4,-269.4) -543.5,-269.4 -543.5,-258.6 cw(c-539.4,-258.6) -539.4,-254.5 -495.6,-254.5 ccw(c-495.6,-242.4) -483.5,-242.4 -483.5,-231.6 ccw(c-495.6,-231.6) -495.6,-219.5 -509.4,-219.5 cw(c-509.4,-215.4) -513.5,-215.4 -513.5,-124.5 -503,-114 -475,-114 -469,-120 P2.13
MIPI1_D1_P: P2.14 U3.A8 | length 701.2
  Top Layer w4: U3.A8 -623.68,-552.18 -619,-547.5 -619,-407.5 -607.69,-396.19 -596.37,-384.87 cw(c-589.96,-379.97) -585.06,-373.56 -573.75,-362.25 cw(c-567.33,-357.35) -562.43,-350.93 -555,-343.5 -521.5,-310 -521.5,-281.5 -539.4,-281.5 cw(c-539.4,-269.4) -551.5,-269.4 -551.5,-258.6 cw(c-539.4,-258.6) -539.4,-246.5 -495.6,-246.5 ccw(c-495.6,-242.4) -491.5,-242.4 -491.5,-231.6 ccw(c-495.6,-231.6) -495.6,-227.5 -509.4,-227.5 cw(c-509.4,-215.4) -521.5,-215.4 -521.5,-121.19 -506.31,-106 -475,-106 -469,-100 P2.14
MIPI1_D2_N: P2.5 U3.B6 | length 700.1
  Top Layer w4: P2.5 -869,-120.5 -862.5,-114 -836,-114 -822,-128 -822,-213.9 ccw(c-809.9,-213.9) -809.9,-226 -800.1,-226 cw(c-800.1,-230.1) -796,-230.1 -796,-240.9 cw(c-800.1,-240.9) -800.1,-245 -835.9,-245 ccw(c-835.9,-257.1) -848,-257.1 -848,-267.9 ccw(c-835.9,-267.9) -835.9,-280 -826.1,-280 cw(c-826.1,-284.1) -822,-284.1 -822,-305.31 -686.77,-440.55 -686.77,-547.23 -686.77,-551.14 -686.77,-563.46 -686.77,-577.14 U3.B6
MIPI1_D2_P: P2.6 U3.A6 | length 702.7
  Top Layer w4: P2.6 -869,-99.5 -862.5,-106 -832.69,-106 -818,-120.69 -814,-124.69 -814,-213.9 ccw(c-809.9,-213.9) -809.9,-218 -800.1,-218 cw(c-800.1,-230.1) -788,-230.1 -788,-240.9 cw(c-800.1,-240.9) -800.1,-253 -835.9,-253 ccw(c-835.9,-257.1) -840,-257.1 -840,-267.9 ccw(c-835.9,-267.9) -835.9,-272 -826.1,-272 cw(c-826.1,-284.1) -814,-284.1 -814,-302 -737,-379 -735.34,-380.66 -724.02,-391.98 cw(c-718.37,-397.63) -712.71,-403.29 -701.4,-414.6 cw(c-695.74,-420.26) -690.08,-425.92 -678.77,-437.23 -678.77,-547.23 -674.86,-551.14 U3.A6
MIPI1_D3_N: P2.1 U3.B5 | length 700.9
  Top Layer w4: P2.1 -1069,-120.5 -1062.5,-114 -1031.5,-114 -1023,-122.5 -1023,-200.5 -996.84,-226.66 ccw(c-994.01,-223.83) -992.13,-227.36 cw(c-987.38,-236.28) -977.26,-236.28 cw(c-987.38,-236.28) -978.45,-241.04 ccw(c-974.92,-242.92) -977.73,-245.77 ; -977.75,-245.75 -713,-510.5 -713,-576.5 U3.B5
MIPI1_D3_P: P2.2 U3.A5 | length 702.2
  Top Layer w4: P2.2 -1069,-99.5 -1062.5,-106 -1028.19,-106 -1015,-119.19 -1015,-197.19 -993.09,-219.09 cw(c-987.38,-236.28) -969.26,-236.28 cw(c-987.38,-236.28) -970.19,-242 -775.34,-436.84 -772.41,-439.77 -761.1,-451.09 cw(c-755.44,-456.75) -749.78,-462.4 -738.47,-473.72 cw(c-732.81,-479.37) -727.16,-485.03 -715.84,-496.34 -710,-502.19 -705,-507.19 -705,-547.5 -700.45,-552.05 U3.A5
MIPI1_DC_N: P2.9 U3.B7 | length 700.1
  Top Layer w4: P2.9 -669,-120 -663,-114 -635,-114 -623,-126 -623,-192.5 -662,-231.5 -662,-244.56 ccw(c-649.9,-244.56) -649.9,-256.66 -641.1,-256.66 cw(c-641.1,-260.76) -637,-260.76 -637,-271.56 cw(c-641.1,-271.56) -641.1,-275.66 -674.9,-275.66 ccw(c-674.9,-287.76) -687,-287.76 -687,-298.56 ccw(c-674.9,-298.56) -674.9,-310.66 -641.1,-310.66 cw(c-641.1,-314.76) -637,-314.76 -637,-325.56 cw(c-641.1,-325.56) -641.1,-329.66 -649.9,-329.66 ccw(c-649.9,-341.76) -662,-341.76 -662,-546.5 -662,-551.23 -662,-563.46 -662,-576.32 U3.B7
MIPI1_DC_P: P2.10 U3.A7 | length 702.7
  Top Layer w4: P2.10 -669,-100 -663,-106 -631.69,-106 -615,-122.69 -615,-195.81 -654,-234.81 -654,-244.56 ccw(c-649.9,-244.56) -649.9,-248.66 -641.1,-248.66 cw(c-641.1,-260.76) -629,-260.76 -629,-271.56 cw(c-641.1,-271.56) -641.1,-283.66 -674.9,-283.66 ccw(c-674.9,-287.76) -679,-287.76 -679,-298.56 ccw(c-674.9,-298.56) -674.9,-302.66 -641.1,-302.66 cw(c-641.1,-314.76) -629,-314.76 -629,-325.56 cw(c-641.1,-325.56) -641.1,-337.66 -649.9,-337.66 ccw(c-649.9,-341.76) -654,-341.76 -654,-454.5 -654,-466.5 cw(c-654,-474.5) -654,-482.5 -654,-498.5 cw(c-654,-506.5) -654,-514.5 -654,-530.5 -654,-546.5 -649.27,-551.23 U3.A7
NetC9_2: C9.2 C10.2 R14.1 U3.B1 U3.G1 U3.H2 | length 906.2
  Top Layer w6: v1(-909.5,-526) -884.27,-551.23 -840.63,-551.23 U3.B1 ; U3.G1 U3.H2
  Top Layer w10: C10.2 C9.2 -1024.5,-806 R14.1 -973.5,-723.5 v1(-895,-723.5) -856.5,-723.5 -850,-717 U3.G1
  Bottom Layer w6: v1(-909.5,-526) -886.5,-549 -844,-549 -780.5,-612.5 -780.5,-688.5 -815.5,-723.5 v1(-895,-723.5)
NetC12_2: C12.2 C13.2 R17.1 U3.B2 U3.B10 U3.C10 U3.G2 U3.J10 U3.K6 | length 1411.6
  Top Layer w6: U3.G2 -748.27,-688.05 -748.27,-618 U3.B2 ; U3.K6 -674.86,-821.64 v1(-664.5,-832) ; U3.J10 -545.82,-768.18 v1(-533,-781) ; U3.C10 U3.B10 v1(-540.5,-589) v1(-540.5,-589)
  Top Layer w10: C13.2 -1009.5,-999 C12.2 -1055.5,-967.5 R17.1 v1(-979.5,-936.5)
  Bottom Layer w6: v1(-748,-618) -719,-589 -615.5,-589 ; v1(-664.5,-832) -664.5,-785 -647,-767.5 -615.5,-767.5 ; v1(-540.5,-589) -615.5,-589 ; v1(-533,-781) -546.5,-767.5 -615.5,-767.5 ; -615.5,-767.5 -615.5,-589
  Bottom Layer w10: v1(-979.5,-936.5) -891.5,-848.5 -681,-848.5 v1(-664.5,-832)
NetC15_2: C15.2 C16.2 R20.1 U3.J7 | length 751.6
  Top Layer w8: R20.1 v1(-1147,-855.5) ; U3.J7 -642.5,-761.41 v1(-642.5,-742)
  Top Layer w10: R20.1 -1224.5,-886 C15.2 C16.2
  Bottom Layer w8: v1(-1147,-855.5) -1109.5,-818 -718.5,-818 v1(-642.5,-742)
NetC17_1: C17.1 U3.J1 | length 107.5
  Top Layer w6: C17.1 -813.13,-778.5 U3.J1
NetC18_1: C18.1 U3.K1 | length 116.3
  Top Layer w6: C18.1 -834.54,-825.5 U3.K1
NetC19_1: C19.1 U3.K2 | length 194.3
  Top Layer w6: C19.1 -852,-867 -804.5,-867 -777.22,-839.72 U3.K2
NetC20_2: C20.2 C21.2 R26.2 R27.1 | length 177.9
  Top Layer w6: R27.1 -1164.5,-371.98 C21.2 C20.2 -1184.5,-443.5 R26.2
NetC23_1: C23.1 U2.5 X1.1 | length 268.8
  Top Layer w6: C23.1 X1.1 -849.81,-1326.47 U2.5
NetC24_1: C24.1 U2.6 X1.3 | length 188.3
  Top Layer w6: C24.1 -823,-1445.7 X1.3 -798.16,-1346.16 U2.6
NetD1_1: D1.1 R10.2 | length 65.6
  Top Layer w8: R10.2 D1.1
NetD2_1: D2.1 R13.2 | length 65.6
  Top Layer w8: R13.2 D2.1
NetK1_1: K1.1 R9.1 U2.7 | length 561.9
  Top Layer w6: K1.1 -833,-1764.5 R9.1 -804.5,-1522 -781,-1498.5 -781,-1376 -770.84,-1365.84 U2.7
NetL1_1: L1.1 U1.11 | length 75.5
  Top Layer w8: U1.11 -1118.26,-1264.26 -1094,-1240 L1.1
NetL2_1: L2.1 U1.6 | length 92.7
  Top Layer w9: U1.6 L2.1
NetL3_1: L3.1 U1.20 | length 89.7
  Top Layer w8: L3.1 U1.20
NetR1_1: R1.1 R2.2 U1.14 | length 145.1
  Top Layer w6: R1.1 R2.2 -1165.5,-1239 U1.14
NetR4_1: R4.1 R6.2 U1.3 | length 130.2
  Top Layer w6: U1.3 -1149.75,-1434.25 R6.2
  Top Layer w10: R4.1 R6.2
NetR5_2: R5.2 U2.32 | length 1146.7
  Top Layer w6: R5.2 v1(-1438.53,-1428.47) ; v1(-638.64,-1349.64) -615.47,-1326.47 U2.32
  Bottom Layer w6: v1(-1438.53,-1428.47) -1391.5,-1475.5 -764.5,-1475.5 v1(-638.64,-1349.64)
NetR7_2: R7.2 U2.33 | length 1183.1
  Top Layer w6: R7.2 v1(-1438.53,-1487.53) ; v1(-617,-1307.5) -404.21,-1307.5 U2.33
  Bottom Layer w6: v1(-1438.53,-1487.53) -736.03,-1487.53 -608.5,-1360 -608.5,-1337.07 -617,-1328.57 v1(-617,-1307.5)
NetR11_1: R11.1 R12.2 U1.2 | length 120.2
  Top Layer w6: R11.1 R12.2 -1165.5,-1458.5 U1.2
NetR15_2: R15.2 U3.A3 | length 398.8
  Top Layer w5: R15.2 -953.96,-343.54 -751.63,-545.87 U3.A3
NetR16_2: R16.2 U3.B3 | length 357.5
  Top Layer w4: R16.2 -829.19,-483.5 -764.5,-548.19 -764.5,-576.18 U3.B3
NetR18_2: R18.2 U3.G5 | length 202.9
  Top Layer w4: R18.2 -704,-886.54 -713,-877.54 -713,-748 -700.45,-735.45 U3.G5
NetR19_2: R19.2 U3.G6 | length 212.3
  Top Layer w4: U3.G6 -674.86,-745.68 -687.5,-758.31 -687.5,-879.5 R19.2
NetR21_2: R21.2 U3.K4 | length 128
  Top Layer w6: R21.2 -726.04,-885.04 U3.K4
NetR22_2: R22.2 U3.K3 | length 172.5
  Top Layer w6: R22.2 -818,-881.5 -791.5,-881.5 -751.63,-841.63 U3.K3
NetR23_1: R23.1 R25.1 U4.4 | length 109.8
  Top Layer w6: U4.4 R23.1 R25.1
NetR26_1: R26.1 U3.A1 | length 483
  Top Layer w6: v1(-1218.5,-483.26) -1218.26,-483.5 R26.1 ; v1(-858.5,-524) -842.27,-524 U3.A1
  Bottom Layer w6: v1(-1218.5,-483.26) -899.24,-483.26 v1(-858.5,-524)
NetR28_1: R28.1 U4.3 | length 60.7
  Top Layer w6: R28.1 U4.3
PA0: U2.10
PA1: U2.11
PA2: P3.9 U2.12 | length 770.1
  Top Layer w6: U2.12 -733.5,-1579 -618.87,-1693.63 -239.63,-1693.63 P3.9
PA3: P3.7 U2.13 | length 755
  Top Layer w6: U2.13 -676.77,-1612.23 -609.5,-1679.5 -251,-1679.5 -216,-1644.5 -216,-1570 P3.7 P3.7@-159,-1518.5
PA4: P3.8 U2.14 | length 890.2
  Top Layer w6: U2.14 -657.08,-1609.42 -601,-1665.5 -255,-1665.5 -229.5,-1640 -229.5,-1510.5 -182,-1463 -109,-1463 P3.8
PA5: U2.15
PA6: P3.5 U2.16 | length 752.5
  Top Layer w6: U2.16 -617.71,-1623.29 -590,-1651 -261.69,-1651 -243.5,-1632.81 -243.5,-1493.86 -162.64,-1413 P3.5
PA7: P3.6 U2.17 | length 885.9
  Top Layer w6: U2.17 -598.03,-1621.47 -583,-1636.5 -274.5,-1636.5 -260,-1622 -260,-1489.5 -213.5,-1443 -213.5,-1391.5 -187,-1365 -107,-1365 P3.6
PWM: U2.29
R_DDC_SCL: HDMI?.15 R15.1 R30.1 | length 522.1
  Top Layer w6: HDMI?.15 -1377.93,-483.26 -1352.19,-509 -1127.5,-509 -1116.5,-498 -1116.5,-417.69 R30.1 R15.1
R_DDC_SDA: HDMI?.16 R16.1 R31.1 | length 578
  Top Layer w6: HDMI?.16 -1342.74,-463.26 v1(-1342.5,-463.5) ; R16.1 -1089,-460.5 ; R31.1 -1089,-460.5 ; v1(-1013,-449) -1024.5,-460.5 -1089,-460.5
  Bottom Layer w6: v1(-1342.5,-463.5) -1293.92,-463.5 -1279.42,-449 v1(-1013,-449)
R_I2C_SCL: P1.6 R21.1 U2.42 | length 944.4
  Top Layer w6: R21.1 -558.66,-1144.34 U2.42 -558.66,-1238.34 v1(-544,-1253)
  Bottom Layer w6: v1(-544,-1253) -544,-1684.5 -523,-1705.5 P1.6
R_I2C_SDA: P1.8 R22.1 U2.43 | length 1048
  Top Layer w6: R22.1 -847.5,-993 -830,-1010.5 -713,-1010.5 -578.34,-1145.16 U2.43 -578.34,-1236.34 v1(-595,-1253)
  Bottom Layer w6: P1.8 -623,-1712 -595,-1684 v1(-595,-1253)
UART1-Rx: P1.2 U2.31 | length 550.2
  Top Layer w6: U2.31 -352.66,-1346.16 v1(-340,-1333.5)
  Bottom Layer w6: v1(-340,-1333.5) -314,-1359.5 -314,-1791.5 P1.2
UART1-Tx: P1.4 U2.30 | length 525.7
  Top Layer w6: U2.30 -351.66,-1365.84 v1(-340,-1377.5)
  Bottom Layer w6: P1.4 -420,-1797.5 -420,-1691 -340,-1611 v1(-340,-1377.5)
USB_N: R5.1 USB1.A7 USB1.B7 | length 212.3
  Top Layer w6: USB1.A7 -1630.16,-1467.84 -1639.5,-1458.5 -1639.5,-1437.5 -1630.47,-1428.47 USB1.B7 R5.1
USB_P: R7.1 USB1.A6 USB1.B6 | length 181.1
  Top Layer w6: USB1.B6 R7.1 -1509,-1470 -1530.84,-1448.16 USB1.A6
USR_LED: D2.2 U2.21 | length 809
  Top Layer w6: D2.2 v1(-1099.5,-1718) ; v1(-707,-1565.5) -707,-1495 -682,-1470 -530,-1470 -519.29,-1480.71 U2.21
  Bottom Layer w6: v1(-1099.5,-1718) -859.5,-1718 v1(-707,-1565.5)
VCC_1V1: C6.2 C7.1 C11.2 L3.2 P3.4 R11.2 R17.2 | length 2917
  Top Layer w8: v1@-1373,-1358 v1(-1372.66,-1358.34) -1372.66,-1509 -1359.66,-1522 C6.2 ; L3.2 -1324.5,-1494.07 C6.2 ; R11.2 C7.1 C6.2 ; v1(-1140,-999) C11.2
  Top Layer w10: C11.2 -1086.7,-982.7 R17.2
  Bottom Layer w8: v1(-1140,-999) -1279.5,-999 -1372.66,-1092.16 v1(-1372.66,-1358.34) -1372.5,-1358.5 -1037,-1358.5 -910.5,-1232 -910.5,-1012 -830.5,-932 -471.5,-932 -231.5,-1172 -231.5,-1321.5 -191,-1362 -108,-1362 P3.4
VCC_1V8: C1.2 C2.1 C14.2 L1.2 P3.3 R1.2 R20.2 R23.2 | length 2068.8
  Top Layer w8: C14.2 -1303,-919 -1313.5,-929.5 -1313.5,-1068.5 -1268,-1114 -1177,-1114 -1161.5,-1129.5 -1161.5,-1154 R1.2
  Top Layer w10: C14.2 -1256.2,-901.7 R20.2 ; R1.2 -1134.45,-1130.95 L1.2 C2.1 C1.2 v1(-975.5,-1091) v1@-974.5,-1090 ; v1@-437,-865.5 v1(-436.5,-866) -422.5,-880 R23.2
  Bottom Layer w10: v1(-975.5,-1091) -975.5,-999 -862,-885.5 -664,-885.5 -644.5,-866 v1(-436.5,-866) -436.5,-900 -187.5,-1149 -131,-1149 -108.5,-1171.5 -108.5,-1262.5 P3.3
VCC_3V3: C4.2 C5.1 C8.2 L2.2 P3.2 R4.2 R9.2 R10.1 R13.1 R14.2 R25.2 R27.2 U2.1 U2.9 U2.24 U2.36 U2.48 | length 5923.3
  Top Layer w8: v1(-1567.5,-805.5) -1209,-805.5 -1178,-774.5 R14.2 ; R10.1 R13.1 -1272,-1680 ; v1(-873,-1563) R9.2 ; U2.9 -664.5,-1405.21 ; U2.1 -676.77,-1247.73 ; U2.48 -676.77,-1247.73 ; v1(-634.5,-1443) -634.5,-1405.21 ; U2.24 -460.23,-1427.77 -482.79,-1405.21 -634.5,-1405.21 ; -676.77,-1247.73 -644,-1280.5 -644,-1320 -664.5,-1340.5 -664.5,-1405.21 ; -664.5,-1405.21 -634.5,-1405.21
  Top Layer w10: R27.2 -1233.8,-199 -1577.5,-199 -1633,-254.5 v1(-1633,-806) -1633,-1184.5 -1707.5,-1259 -1707.5,-1647 -1674.5,-1680 -1272,-1680 -1137.5,-1680 -1068,-1610.5 R4.2 C5.1 C4.2 ; C8.2 -1086.7,-820.7 R14.2 ; L2.2 -973,-1493.07 C4.2 ; R9.2 C4.2 ; U2.24 -378,-1521 -304,-1447 -304,-1247.73 ; U2.36 -304,-1247.73 ; R25.2 -365.5,-911 -304,-972.5 -304,-1247.73 ; P3.2 -110,-1264 -205.5,-1264 -221.77,-1247.73 -304,-1247.73
  Bottom Layer w8: v1(-1633,-806) -1568,-806 v1(-1567.5,-805.5) ; v1(-873,-1563) -754.5,-1563 v1(-634.5,-1443)
VDD_HDMI_5V: C22.2 HDMI?.18 R29.2 R30.2 R31.2 R32.2 R33.1 | length 862.5
  Top Layer w6: HDMI?.18 -1325.24,-424.26 v1(-1311.5,-438) -1279.77,-438 R29.2 C22.2 ; v1(-1121.11,-296.89) R33.1 R32.2 ; R31.2 R30.2 v1(-1016.89,-390.19)
  Bottom Layer w6: v1(-1311.5,-438) -1311.5,-352 -1256.39,-296.89 v1(-1121.11,-296.89) -1053.61,-296.89 -1016.89,-333.61 v1(-1016.89,-390.19)
VUSB: C3.2 P1.7 P3.1 R29.1 U1.7 U1.8 U1.9 U1.10 U1.16 U1.18 U1.19 USB1.A4 USB1.A9 USB1.B4 USB1.B9 | length 5340.9
  Top Layer w8: U1.7 U1.8 U1.9 U1.10 v1(-1050.03,-1316.53)
  Top Layer w10: USB1.B9 -1628.92,-1369.42 -1665.5,-1406 -1665.5,-1509.5 -1628.42,-1546.58 USB1.B4 -1522.58,-1546.58 v1(-1521.5,-1545.5) ; USB1.A4 -1528.5,-1357.61 ; R29.1 -1211.5,-409.73 -1211.5,-277 -1263.5,-225 -1568,-225 -1598.5,-255.5 -1598.5,-1188.34 -1528.5,-1258.34 -1528.5,-1357.61 ; U1.19 -1248.1,-1363.77 -1276,-1335.87 C3.2 ; U1.18 -1237.9,-1348.02 -1248.5,-1337.42 v1(-1248.5,-1316.53) ; U1.16 v1(-1248.5,-1316.53) ; v1(-698,-1800.5) P1.7 ; -1528.5,-1357.61 -1420.61,-1357.61 -1345,-1282 -1290.5,-1282 -1276,-1296.5 C3.2 ; C3.2 v1(-1248.5,-1316.53)
  Bottom Layer w8: v1(-1248.5,-1316.53) v1(-1050.03,-1316.53)
  Bottom Layer w10: v1(-1521.5,-1545.5) -1521.5,-1671.5 -1446,-1747 -751.5,-1747 v1(-698,-1800.5) ; v1(-1050.03,-1316.53) -938,-1204.5 -938,-1001 -846,-909 -463,-909 P3.1
pads on no net: HDMI?.14 K1.0 U2.2 U2.3 U2.4 U2.18 U2.19 U2.22 U2.25 U2.26 U2.27 U2.28 U2.38 U2.39 U2.40 U2.41 U3.J2 U3.J4 U3.J5 U3.J6 U3.J8 U3.J9 U3.K5 U3.K7 U4.1 USB1.0 USB1.A5 USB1.A8 USB1.B5 USB1.B8

## Polygon pours and split planes (outlines as drawn)
GND on Top Layer "GND_L01_P002" (solid, remove dead copper, pour order 2): -1889.76,-1889.76 -1889.76,0 0,0 0,-1889.76
GND on Bottom Layer "GND_L02_P003" (solid, remove dead copper, pour order 3): -1889.76,-1889.76 -1889.76,0 0,0 0,-1889.76

## Keep-outs
Keep-Out Layer:
  the board outline again, w3.94